# Altium PCB PCB2.PcbDoc
Units mil, origin at the board's own origin, x right, y up, seen from the top; angles counter-clockwise.
Board outline 2600 x 1185 mil, 2 copper layers (Top Layer, Bottom Layer); 31 components, 27 nets, 97 pads, 24 vias.
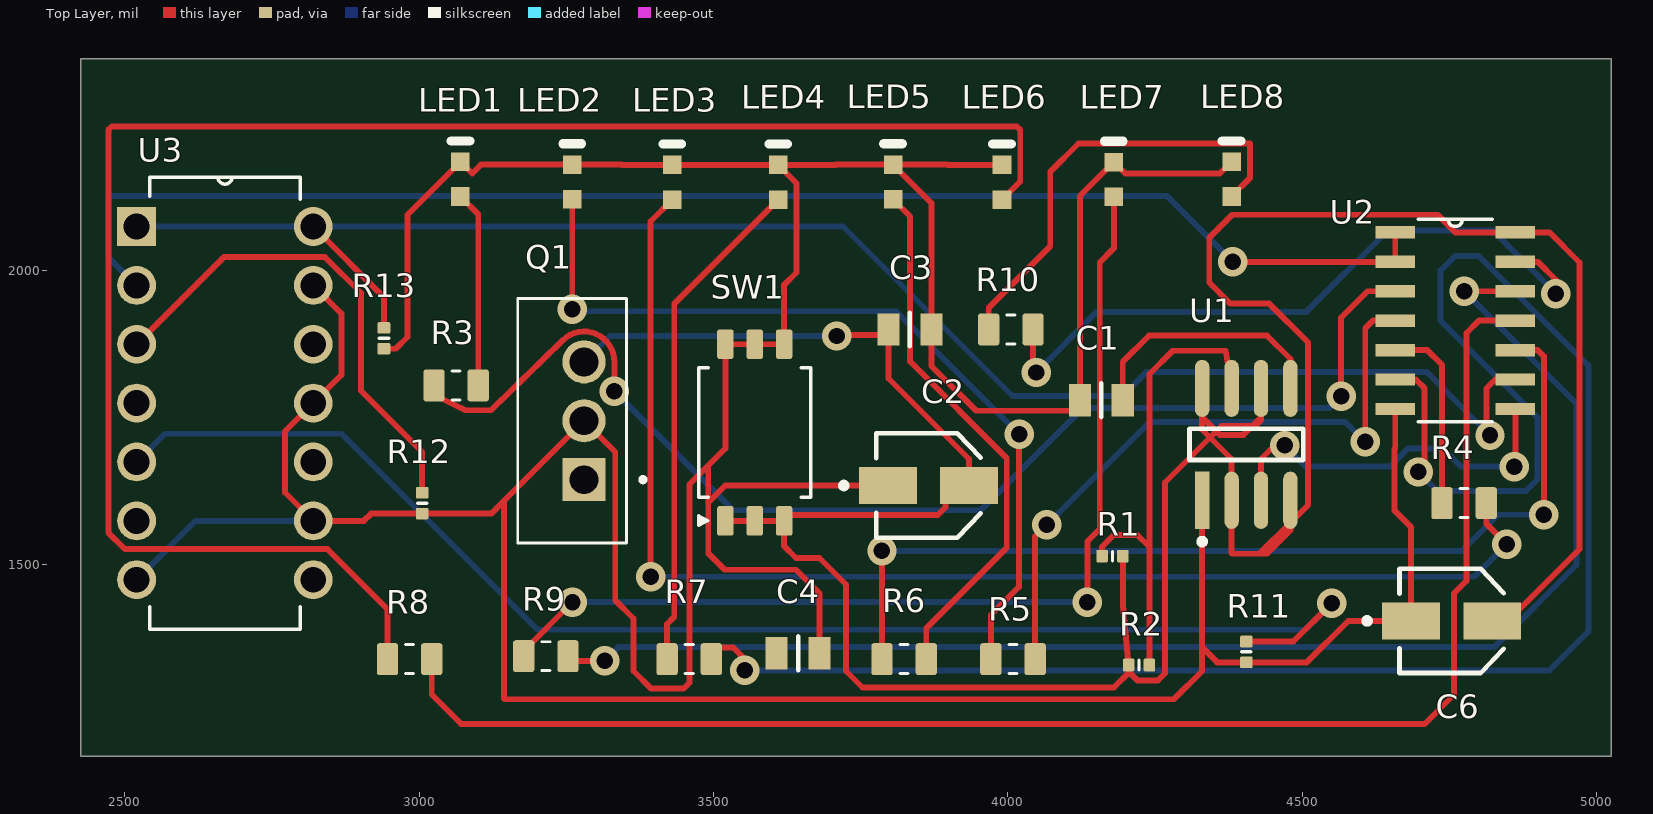
[diagram p0: Top Layer view]
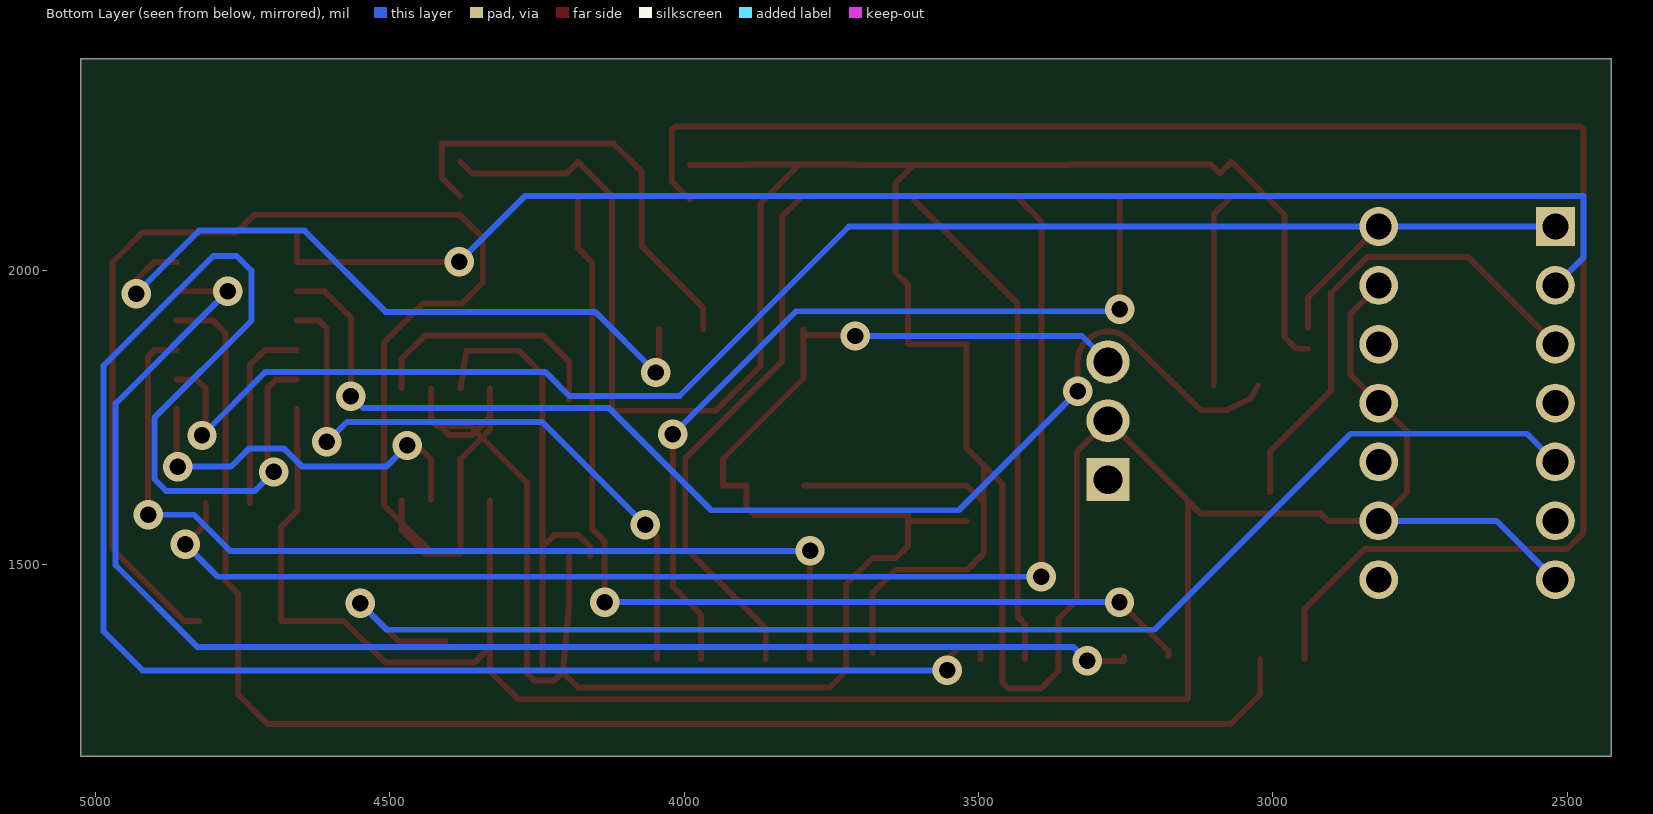
[diagram p1: Bottom Layer view, seen from below]
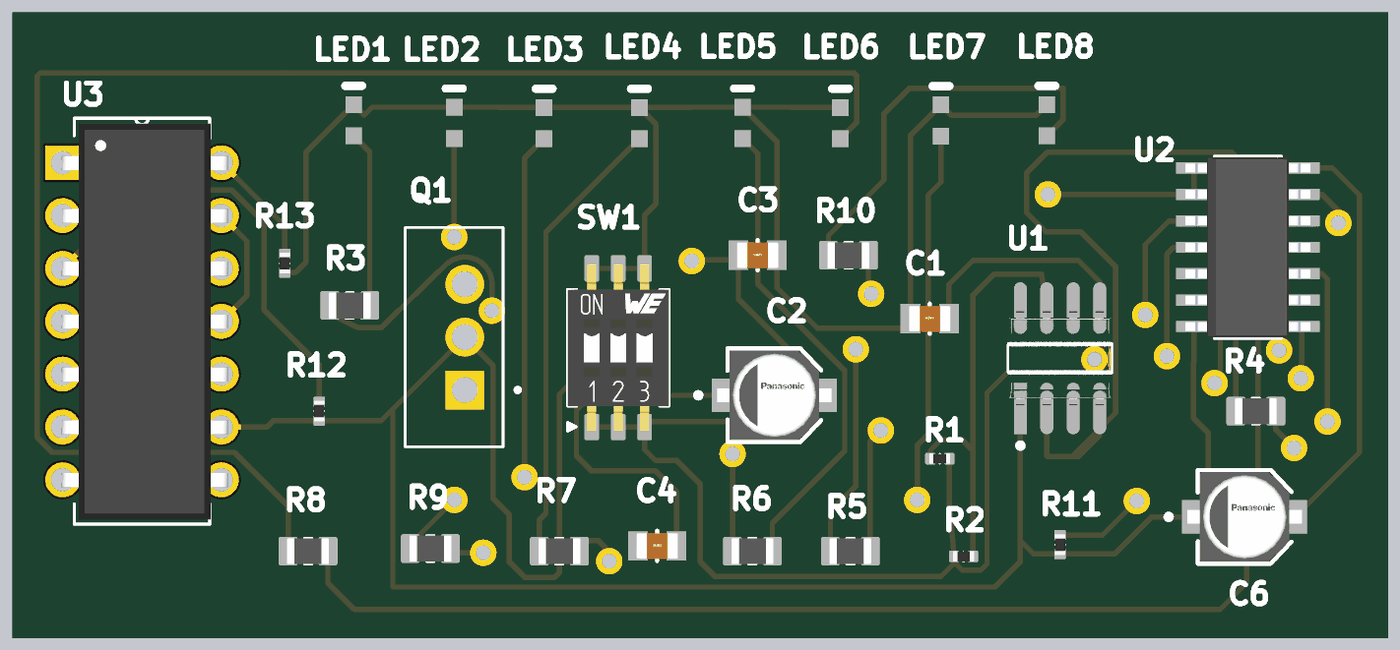
[diagram p2: 3D render of the assembled board from above, using the file's embedded part models]

## Layer stack, top to bottom
Top Solder: solder mask 0.4, Solder Resist, Dk 3.5
Top Layer: signal copper 1.4
Dielectric 1: dielectric 12.6, FR-4, Dk 4.8
Bottom Layer: signal copper 1.4
Bottom Solder: solder mask 0.4, Solder Resist, Dk 3.5

## Board outline
2425,1175 5025,1175 5025,2360 2425,2360

## Design rules (kind name [scope] priority, off if disabled: settings)
Clearance [All] p1: gap=10 ignorepadtopadclearanceinfootprint=FALSE
PolygonConnect [All] p1: connectstyle=Relief reliefconductorwidth=10 reliefentries=4 polygonreliefangle="90 Angle" airgapwidth=10
RoutingVias [All] p1: holewidth=28 width=50 viastyle="Through Hole" minholewidth=28 minwidth=50 maxholewidth=28 maxwidth=50
SilkToSolderMaskClearance [IsPad] p1: minsilkscreentomaskgap=4.5 clearancetoexposedcopper=TRUE
SolderMaskExpansion [All] p1: expansion=0 istentingtop=FALSE
SupplyNets "Schematic Supply Nets_1" [InNet('+5')] p1: voltage=0.000
SupplyNets "Schematic Supply Nets" [InNet('GND')] p2: voltage=0.000
Width [All] p1: maxlimit=10 minlimit=10 preferedwidth=10
29 further rules are at their usual default settings.

## Components (designator, comment, footprint, x,y, rotation, side; value= is the part's Value field where it differs from the comment)
C1 "CC0805KKX7RYBB104" FP-CC0805-EB-MFG 4158.7,1780 r0 top
C2 "EEEFK1C100R" FP-FKB-MFG 3865,1635 r0 top
C3 "CC0805KKX7RYBB104" FP-CC0805-EB-MFG 3833.58,1900 r0 top
C4 "0.01uf" FP-CC0805-EB-MFG 3643.7,1350 r0 top
C6 "EEEFK1C100R" FP-FKB-MFG 4753.9,1405 r0 top
LED1 "" LTST-C190KSKT_V 3070,2155.47 r90 top
LED2 "" LTST-C190KSKT_V 3260,2150.47 r90 top
LED3 "" LTST-C190KSKT_V 3430,2150 r90 top
LED4 "" LTST-C190KSKT_V 3610,2150 r90 top
LED5 "" LTST-C190KSKT_V 3805,2150.47 r90 top
LED6 "" LTST-C190KSKT_V 3990,2150 r90 top
LED7 "" LTST-C190KSKT_V 4180,2155 r90 top
LED8 "" LTST-C190KSKT_V 4380,2155.47 r90 top
Q1 "LM7805CT/NOPB" TO254P1054X470X1955-3 3280,1745 r90 top
R1 "Resistor 100K +/-1 % 0402 63 mW" RESC0402(1005)_L 4177.72,1515 r0 top value=100k
R2 "Resistor 10K  +/-1 % 0402 63 mW" RESC0402(1005)_L 4222.72,1330 r0 top value=10k
R3 "330RL" RESC2012X60N 3062.6,1805 r0 top
R4 "330RL" RESC2012X60N 4775,1605 r0 top
R5 "330RL" RESC2012X60N 4008.7,1340 r0 top
R6 "330RL" RESC2012X60N 3823.7,1340 r0 top
R7 "330RL" RESC2012X60N 3458.7,1340 r0 top
R8 "330RL" RESC2012X60N 2983.7,1340 r0 top
R9 "330RL" RESC2012X60N 3215,1345 r0 top
R10 "330RL" RESC2012X60N 4005,1900 r0 top
R11 "Resistor 10K  +/-1 % 0402 63 mW" RESC0402(1005)_L 4405,1352.28 r90 top value=10k
R12 "Resistor 10K  +/-1 % 0402 63 mW" RESC0402(1005)_L 3005,1605 r90 top value=10k
R13 "Resistor 10K  +/-1 % 0402 63 mW" RESC0402(1005)_L 2940,1885 r90 top value=10k
SW1 "416131160803" 416131160803 3570,1725 r0 top
U1 "NE555DR" FP-D0008A-IPC_A 4405,1705 r90 top
U2 "74HC164D,652" SOIC127P600X175-14N 4760,1915 r0 top
U3 "74HC14N,652" DIP254P762X420-14 2820,1475 r0 top

## Footprints (in the part's own frame and the unit in brackets; to place one, negate y for a bottom-side part, rotate by r counter-clockwise, add the part's x,y. Pads: shape width x height; smd on the part's side, far side on the other; paste and mask are expansions set on the pad)
416131160803 [mm] "03p, 1.27mm Pitch, Horizontal, HP Type, SMT, flat Actuator, black, with Tape, T&R"
  rrect25% 0.7x1.27 smd: 1(-1.27,-3.81) 2(0,-3.81) 3(1.27,-3.81) 4(1.27,3.81) 5(0,3.81) 6(-1.27,3.81)
  silkscreen extent -2.42,-4 2.43,2.8, body extent -2.42,-4 2.43,4, height 2.06
DIP254P762X420-14 [mil]
  rect 66x66 / inner round 66 / far side rect 66x66 hole 44 mask+4.02: 1(-300,600)
  round 66 hole 44 mask+4.02: 2(-300,500) 3(-300,400) 4(-300,300) 5(-300,200) 6(-300,100) 7(-300,0) 8(0,0) 9(0,100) 10(0,200) 11(0,300) 12(0,400) 13(0,500) 14(0,600)
  silkscreen extent -278,-84 -22,684, body extent -303,-75 13,674, height 165
FP-CC0805-EB-MFG [mm]
  rect 0.95x1.4 smd paste+0 mask+0: 1(-0.925,0) 2(0.925,0)
  silkscreen extent 0,-0.73 0,0.73, body extent -1.6,-1.05 1.6,1.05, height 0.25
FP-D0008A-IPC_A [mil]
  rect 97.21x24.49 smd paste+0 mask+0: 1(-95.02,75)
  rrect100% 97.21x24.49 smd paste+0 mask+0: 2(-95.02,25) 3(-95.02,-25) 4(-95.02,-75) 5(95.02,-75) 6(95.02,-25) 7(95.02,25) 8(95.02,75)
  silkscreen extent -170,-97 27,97, body extent -163,-116 163,116, height 10
FP-FKB-MFG [mm]
  rect 2.5x1.6 smd paste+0 mask+0: 1(-1.75,0) 2(1.75,0)
  silkscreen extent -3.77,-2.25 2.25,2.25, body extent -3.25,-2.5 3.25,2.5, height 0.25
LTST-C190KSKT_V [mm] "SMD, 2-Leads, Body 1.6x0.8mm"
  rect 0.8x0.8 smd: 1(-0.75,0) 2(0.75,0)
  silkscreen extent 1.65,-0.4 1.65,0.4, body extent -0.8,-0.4 0.8,0.4, height 0.9
RESC0402(1005)_L [mm] "Chip Resistor, Body 1.0x0.5mm, IPC High Density"
  rrect25% 0.5x0.55 smd: 1(-0.45,0) 2(0.45,0)
  silkscreen extent 0,-0.2 0,0.2, body extent -0.5,-0.25 0.5,0.25, height 0.3
RESC2012X60N [mm]
  rrect25% 0.92x1.38 smd: 1(-0.955,0) 2(0.955,0)
  silkscreen extent -0.17,-0.62 0.17,0.62, body extent -1,-0.63 1,0.63, height 0.3
SOIC127P600X175-14N [mil]
  rect 67x21 smd: 1(-102,150) 2(-102,100) 3(-102,50) 4(-102,0) 5(-102,-50) 6(-102,-100) 7(-102,-150) 8(102,-150) 9(102,-100) 10(102,-50) 11(102,0) 12(102,50) 13(102,100) 14(102,150)
  silkscreen extent -63,-172 63,172, body extent -118,-170 118,170, height 69
TO254P1054X470X1955-3 [mm]
  rect 1.86x1.86 / inner round 1.86 / far side rect 1.86x1.86 hole 1.24: 1(-2.54,0)
  round 1.86 hole 1.24: 2(0,0) 3(2.54,0)
  silkscreen extent -5.27,-2.64 5.27,2.86

## Part data
C1 C3 C4: library part CMP-00621-107850848-1, "CC0805KKX7RYBB104 Capacitor Ceramic 0.01uF 250V X7R 10% 0805 T/R", Capacitance=100nF, Case/Package=0805, Max Operating Temperature=125°C, Min Operating Temperature=-55°C, Tolerance=10%, Voltage Rating=250V, Height=1.45mm, Material=Ceramic, NexarPartId=107850848
C2 C6: library part CMP-05427-000100-1, "CAP ALUM 10UF 20% 16V SMD", Capacitance=10uF, Case/Package=Radial, Dielectric Material=Aluminium, ESR (Equivalent Series Resistance)=1.35R, Leakage Current=3uA, Max Operating Temperature=105°C, Min Operating Temperature=-55°C, Package Quantity=2000, Ripple Current=90mA, Tolerance=20%, Voltage=16V, Construction=Cylindrical, Contact Plating=Tin, Diameter=4mm, Height=5.8mm, Height - Seated (Max)=0.24inch, Impedance=1.35R, Lead Free="Lead Free", Length=5.8mm, Life (Hours)=2000Hour, Mount="Surface Mount", Number of Pins=2, Packaging="Tape and Reel", Polarity=Polar, Radiation Hardening=No, REACH SVHC="No SVHC", Ripple Current (AC)=90mA, RoHS Compliant=Yes, Series=FK, Termination=SMD/SMT, Voltage Rating=16V, Voltage Rating (DC)=16V, Width=5.5mm
LED1 LED2 LED3 LED4 LED5 LED6 LED7 LED8: library part CMP-007-00025-2, "LED Uni-Color Yellow, 75 mW, 30 mA, -30 to 85 degC, 2-Pin SMD, RoHS, Tape and Reel", Case/Package=0603, Colour=Yellow, Forward Current=20mA, Forward Voltage=2V, Manufacturer=Lite-On, Max Operating Temperature=85°C, Min Operating Temperature=-55°C, Package Description="2-Pin Surface Mount Device, Body 1.6 x 0.8 mm", Package Quantity=3000, Package Reference=C190KSKT, Power=75mW, Datasheet URL=http://optoelectronics.liteon.com/upload/download/DS-22-99-0189/S_110_LTST-C190KSKT.pdf, Datasheet Version="Rev. I, 10/2012", Illumination Colour=Yellow, Lens Style=Diffused, Luminous Intensity=28mcd, Manufacturer URL=http://www.us.liteon.com/, Mounting Technology=SM, Nominal Vf=2.1V, Packaging=TapeandReel, Pins=2, RoHS Compliant=True, Viewing Angle=130degrees
Q1: Package=None, Availability=Unavailable, MF="{'manufacturer': u'Texas Instruments'}", MP=LM7805CT/NOPB, Price=None
R1: library part CMP-009-00168-3, "Chip Resistor, 100 kOhms, +/-1 %, 63 mW, -55 to 155 degC, 0402", Case/Package=0402, Max Operating Temperature=155°C, Min Operating Temperature=-55°C, Power=63mW, Tolerance=1%, Pins=2
R2 R11 R12 R13: library part CMP-009-00149-3, "Chip Resistor, 10 kOhms, +/-1 %, 63 mW, -55 to 125 degC, 0402", Case/Package=0402, Max Operating Temperature=155°C, Min Operating Temperature=-55°C, Power=63mW, Tolerance=1%, Pins=2
R3 R4 R5 R6 R7 R8 R9 R10: library part RC0805FR-7W330RL, Package=None, Availability=Unavailable, MP=RC0805FR-7W330RL, Price=None
SW1: library part CMP-011-00012-3, "WS-DISV 1.27 mm small compact SMD Dip Switch with top tape", ComponentLink1Description="Manufacturer URL", ComponentLink1URL=http://www.we-online.com, ComponentLink2Description=Datasheet, ComponentLink2URL=http://katalog.we-online.de/em/datasheet/4161311608xx.pdf, Pins=6
U1: library part CMP-1685-00007-2, "IC OSC SGL TIMER 100KHZ 8-SOIC", Case/Package=SOIC, Frequency=100kHz, High Level Output Current=-200mA, Low Level Output Current=200mA, Max Operating Temperature=70°C, Max Supply Voltage=16V, Min Operating Temperature=0°C, Min Supply Voltage=4.5V, Operating Supply Current=10mA, Package Quantity=2500, Quiescent Current=15mA, Contact Plating=Gold, Height=1.58mm, Lead Free="Lead Free", Length=4.9mm, Mount="Surface Mount", Number of Pins=8, Number of Timers/Counters=1, Packaging="Tape and Reel", Radiation Hardening=No, REACH SVHC="No SVHC", Weight=0.002561oz, Width=3.91mm
U2: "Shift Shift Register 1 Element 8 Bit 14-SO", Package="SOIC-14 Nexperia USA", Check_prices=https://www.snapeda.com/parts/74HC164D,652/Nexperia/view-part/?ref=eda, MF="Nexperia USA Inc.", MP=74HC164D,652, SnapEDA_Link=https://www.snapeda.com/parts/74HC164D,652/Nexperia/view-part/?ref=snap
U3: "Inverter IC 6 Channel Schmitt Trigger 14-DIP", Package="DIP-14 Nexperia", Check_prices=https://www.snapeda.com/parts/74HC14N,652/NXP+Semiconductors/view-part/?ref=eda, MF="NXP USA", MP=74HC14N,652, SnapEDA_Link=https://www.snapeda.com/parts/74HC14N,652/NXP+Semiconductors/view-part/?ref=snap

## Via types
v1: diameter 50, hole 28, Top Layer to Bottom Layer, 24 vias

## Nets (pads, with @x,y where several pads share a name; then routed paths per layer and width w, separated by ;. In a path a pad name is that pad's centre, name@x,y a point inside that pad or via, vN(x,y) a via of type N, cw(c..) or ccw(c..) an arc to the next point about the centre after c; other vN are vias at no path point)
+5: C2.2 C3.1 C6.2 Q1.3 R1.2 R2.1 SW1.1 SW1.2 SW1.3 U1.2 U1.4 U1.6 U1.8 U2.14 | length 5653.9
  Top Layer w10: SW1.1 SW1.2 SW1.3 ; v1(3709,1889) 3711,1891 C3.1@3797.17,1891 ; C3.1 C3.1@3797.17,1891 ; R1.2 4195.43,1431.57 R2.1 ; U1.8 4330,1751 ; U1.6 4430,1751 ; U1.4 U1.4@4480,1572 ; C6.2 4849.29,1405 4971,1526.71 4971,2014 4920,2065 U2.14 4760,2065 4730,2095 4381,2095 4342,2056 4342,1980 4378,1944 4444,1944 4510,1878 4510,1602 U1.4@4480,1572 ; SW1.3 3620,1532 3640,1512 3680,1512 3725,1467 3725,1320 3753,1292 4180,1292 4206,1318 ; SW1.3 3620,1584.87 3880.87,1584.87 3894,1598 3894,1635 C2.2 3934,1635 3934,1680 3797.17,1816.83 C3.1@3797.17,1891 ; R2.1 4206,1318 ; R2.1 4205,1319 4206,1318 ; 4206,1318 4220,1304 4255,1304 4267,1316 4267,1640 4343.5,1716.5 ; 4330,1751 4330,1730 4343.5,1716.5 ; 4330,1751 4354,1727 ; 4343.5,1716.5 4380,1680 U1.2 4380,1520 4381,1519 4427,1519 ; 4343.5,1716.5 4354,1727 ; 4354,1727 4360,1721 4400,1721 4415,1736 ; 4354,1727 4363,1736 4415,1736 ; 4415,1736 4420,1736 4430,1746 4430,1751 ; 4415,1736 4430,1751 ; 4427,1519 U1.4@4480,1572 ; 4427,1519 4440,1519 4480,1559 U1.4@4480,1572
  Bottom Layer w10: Q1.3 3324,1889 v1(3709,1889)
GND: C1.1 C2.1 C3.2 C4.2 C6.1 LED1.2 LED2.2 LED3.2 LED4.2 LED5.2 LED6.2 LED7.2 LED8.2 Q1.2 R11.1 R12.1 R13.1 SW1.4 SW1.5 SW1.6 U1.1 U2.7 U3.7 U3.9 U3.11 U3.13 | length 8967.2
  Top Layer w10: U3.13 2868,1927 2868,1823 U3.11 2772,1727 2772,1623 U3.9 2906,1575 2918.28,1587.28 R12.1 3122.28,1587.28 3144,1609 ; R13.1 2960,1867.28 2980,1887.28 2980,2095 LED1.2 3090,2165 3105,2180 LED2.2 3344,2180 3344.47,2179.53 LED3.2 LED4.2 ; C4.2 3680.12,1451.88 3640,1492 3519,1492 3491,1520 3491,1606 ; C2.1 3520,1635 3491,1606 ; LED6.2 3897.47,2179.53 3897,2180 LED5.2 ; U1.1 4330,1360 ; LED8.2 4360,2165 4199.53,2165 LED7.2 4122.28,2126.81 C1.1 4122.28,1762 3946,1762 3870,1838 C3.2 3870,2115 LED5.2 ; U2.7 4658,1698 4657,1697 4657,1592.36 4685,1564.36 C6.1 4578.11,1405 4507.68,1334.57 R11.1 4355.43,1334.57 4330,1360 ; 3144,1609 Q1.2 3333,1692 3333,1440 3364,1409 3364,1320 3394,1290 3449,1290 3459,1300 3459,1637 3491,1669 ; 3144,1609 3144,1273 3145,1272 4282,1272 4330,1320 4330,1360 ; 3491,1606 3491,1669 ; 3491,1669 3520,1698 SW1.6 SW1.5 SW1.4 3620,1976 3641,1997 3641,2148.53 LED4.2 ; LED4.2 3707,2179.53 3707.47,2180 LED5.2
  Bottom Layer w10: U3.7 2620,1575 U3.9
NetC1_2: C1.2 U1.5 | length 435.1
  Top Layer w10: C1.2 4195.12,1845.12 4240,1890 4440,1890 4480,1850 U1.5
NetC4_1: C4.1
NetLED1_1: LED1.1 R3.2 | length 333.5
  Top Layer w10: LED1.1 3100.2,2095.75 R3.2
NetLED2_1: LED2.1 R5.1 | length 1435.4
  Top Layer w10: v1(3260,1934.4) LED2.1 ; R5.1 3971.1,1415 4019,1462.9 v1(4019,1722)
  Bottom Layer w10: v1(3260,1934.4) 3263.4,1931 3810,1931 v1(4019,1722)
NetLED3_1: LED3.1 R4.2 | length 2217.1
  Top Layer w10: v1(3393,1480) 3393,2083.47 LED3.1 ; R4.2 4812.6,1570 v1(4847.3,1535.3)
  Bottom Layer w10: v1(3393,1480) 4792,1480 v1(4847.3,1535.3)
NetLED4_1: LED4.1 R7.1 | length 858.7
  Top Layer w10: R7.1 3421.1,1399.83 3433.24,1411.97 3433.24,1943.71 LED4.1
NetLED5_1: LED5.1 R6.2 | length 917.6
  Top Layer w10: LED5.1 3834,2091.94 3834,1845.61 3998.11,1681.5 3998.11,1529.39 3861.3,1392.57 R6.2
NetLED6_1: LED6.1 R8.1 | length 2982.4
  Top Layer w10: R8.1 2946.1,1424.9 2844,1527 2500,1527 2472,1555 2472,2239.14 2477.86,2245 4015.14,2245 4021,2239.14 4021,2151.47 LED6.1
NetLED7_1: LED7.1 R9.1 | length 1708.1
  Top Layer w10: R9.1 3177.4,1354 v1(3260.4,1437) ; v1(4135,1437) 4135,1540 4156,1561 4156,2014 4180,2038 LED7.1
  Bottom Layer w10: v1(3260.4,1437) v1(4135,1437)
NetLED8_1: LED8.1 R10.1 | length 773.1
  Top Layer w10: R10.1 3967.4,1937 4072,2041.6 4072,2168 4120,2216 4411,2216 4411,2156.94 LED8.1
NetQ1_1: Q1.1
NetR1_1: R1.1 R2.2 U1.7 | length 818.3
  Top Layer w10: R1.1 4160,1531 4180,1551 4220,1551 4240.43,1530.57 ; R2.2 4240.43,1530.57 ; U1.7 4370,1864 4280,1864 4240.43,1824.43 4240.43,1530.57
NetR3_1: R3.1 U2.3 | length 2098.1
  Top Layer w10: R3.1 3038.11,1782.83 3078.53,1762.83 3121.87,1762.83 3243.96,1881.94 cw(c3280,1845) 3331.61,1844.64 v1(3331.27,1795) ; v1(4566,1787) 4566,1920 4611,1965 U2.3
  Bottom Layer w10: v1(3331.27,1795) 3533.27,1593 3954.14,1593 4128,1766.86 4545.86,1766.86 v1(4566,1787)
NetR4_1: R4.1 U2.5 | length 324.8
  Top Layer w10: U2.5 4712.4,1865 4737.4,1840 R4.1
NetR5_2: R5.2 U2.4 | length 1113.1
  Top Layer w10: R5.2 4046.3,1548.3 v1(4066.3,1568.3) ; v1(4607,1709) 4607,1902 4620,1915 U2.4
  Bottom Layer w10: v1(4066.3,1568.3) 4241,1743 4573,1743 v1(4607,1709)
NetR6_1: R6.1 U2.10 | length 1655.8
  Top Layer w10: R6.1 v1(3786.1,1524) ; U2.10 4900,1865 4910.5,1854.5 v1(4910.5,1585.34)
  Bottom Layer w10: v1(3786.1,1524) 4771.38,1524 4832.72,1585.34 v1(4910.5,1585.34)
NetR7_2: R7.2 U2.6 | length 3204.4
  Top Layer w10: R7.2 3496.3,1360 3533,1360 3553,1340 v1(3553,1321) ; U2.6 4693,1815 4708,1800 4708,1669 v1(4697,1658)
  Bottom Layer w10: v1(3553,1321) 4920,1321 4986,1387 4986,1839 4800,2025 4760,2025 4735,2000 4735,1915 4900,1750 4900,1646 4880,1626 4729,1626 v1(4697,1658)
NetR8_2: R8.2 U2.11 | length 2552.5
  Top Layer w10: R8.2 3021.3,1280 3071.3,1230 4708,1230 4758,1280 4758,1452 4779,1473 4779,1894 4800,1915 U2.11
NetR9_2: R9.2 U2.12 | length 2420
  Top Layer w10: R9.2 3252.6,1337 v1(3315,1337) ; v1(4775,1965) U2.12
  Bottom Layer w10: v1(3315,1337) 3339,1361 4827,1361 4966,1500 4966,1774 v1(4775,1965)
NetR10_2: R10.2 U2.13 | length 1207.2
  Top Layer w10: R10.2 4042.6,1832.4 v1(4048,1827) ; U2.13 4900,2015 4931,1984 v1(4931,1961)
  Bottom Layer w10: v1(4048,1827) 4151,1930 4507,1930 4645,2068 4824,2068 v1(4931,1961)
NetR11_2: R11.2 U3.5 | length 2378.4
  Top Layer w10: R11.2 4485,1370 v1(4550,1435)
  Bottom Layer w10: U3.5 2568,1723 2868,1723 3201,1390 4505,1390 v1(4550,1435)
NetR12_2: R12.2 U3.3 | length 849.9
  Top Layer w10: U3.3 2668,2023 2840,2023 2901,1962 2901,1796 3005,1692 R12.2
NetR13_2: R13.2 U2.9 U3.1 U3.14 | length 2839.7
  Top Layer w10: U3.14 2940,1955 R13.2 ; v1(4819,1720) 4813,1726 4813,1800 4828,1815 U2.9
  Bottom Layer w10: U3.1 U3.14 3720,2075 4008,1787 4195,1787 4236,1828 4711,1828 v1(4819,1720)
NetU1_3: U1.3 U2.8 | length 649.1
  Top Layer w10: U1.3 4430,1680 4453,1703 v1(4470,1703) ; v1(4860,1667) 4862,1669 U2.8
  Bottom Layer w10: v1(4470,1703) 4506,1667 4648.89,1667 4680,1698.11 4738.5,1698.11 4769.61,1667 v1(4860,1667)
NetU2_1: U2.1 U2.2 U3.2 | length 2454.3
  Top Layer w10: v1(4382,2015) U2.2 U2.1
  Bottom Layer w10: U3.2 2472,2023 2472,2127 4270,2127 v1(4382,2015)
pads on no net: U3.4 U3.6 U3.8 U3.10 U3.12